# EAGLE board LCD_PCB (EAGLE 9.7.0)
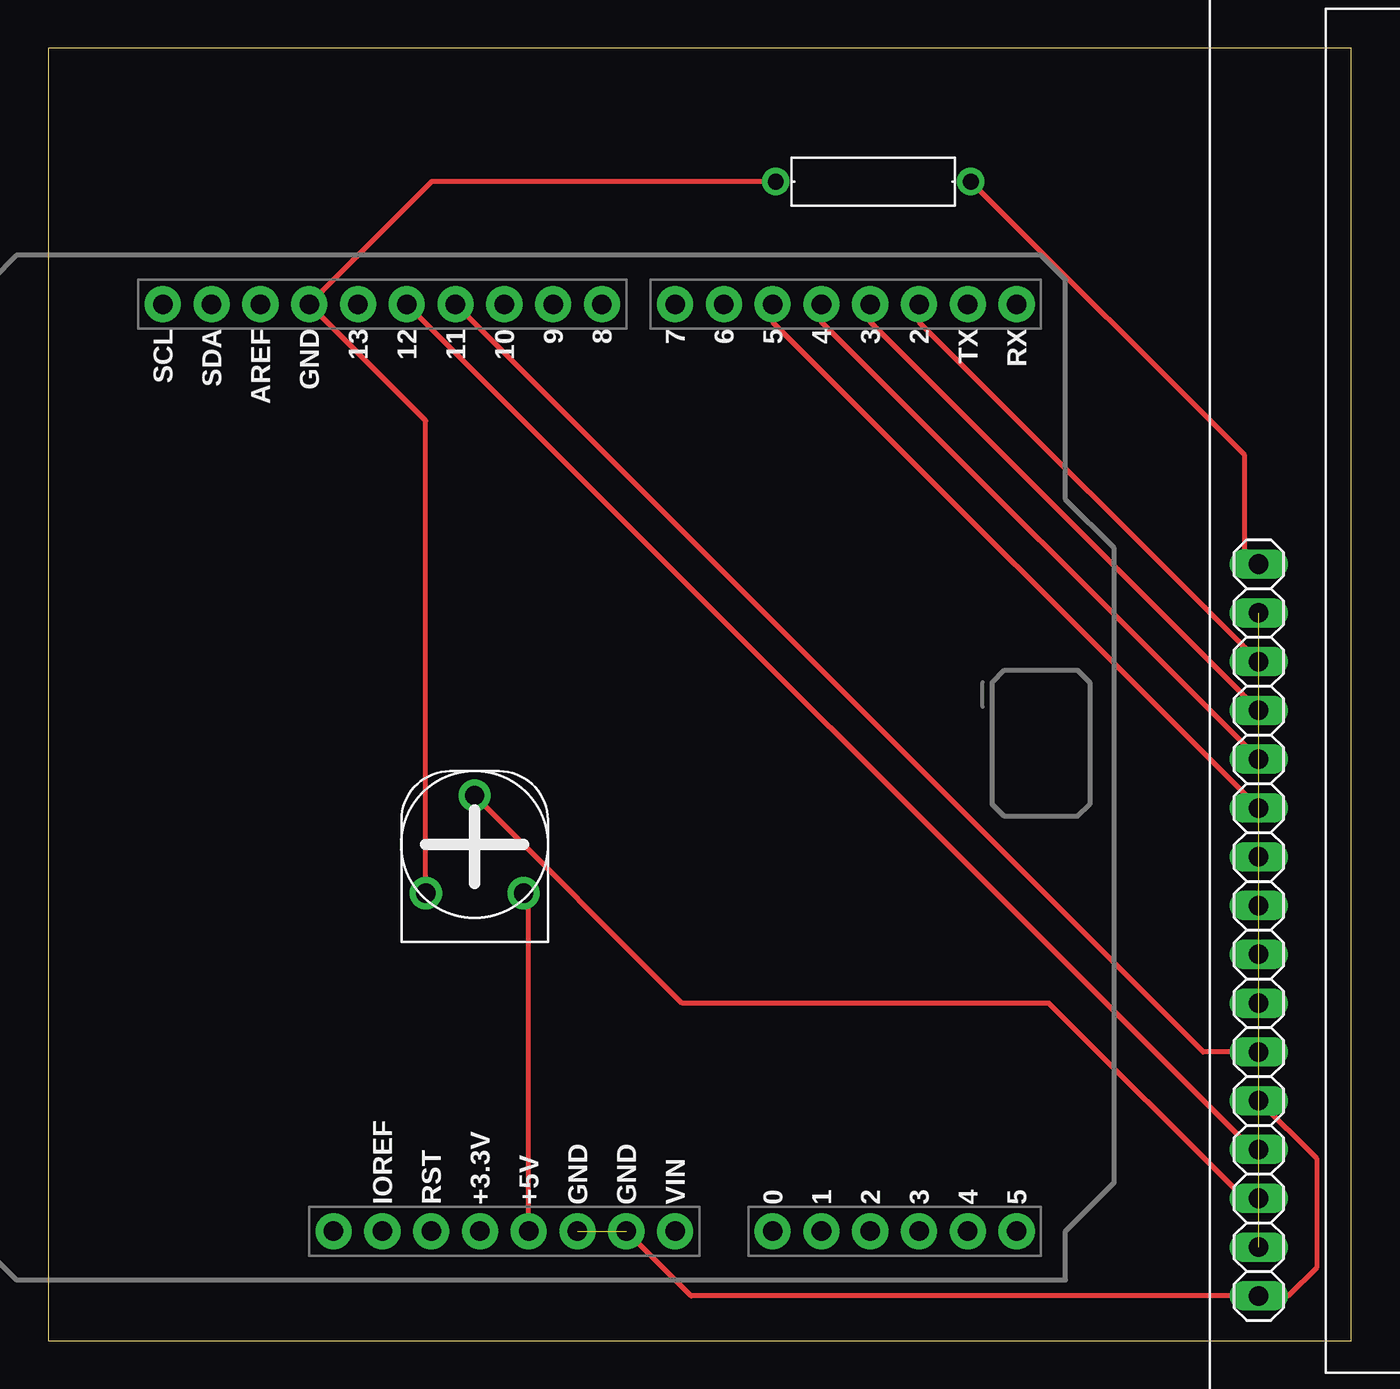
[diagram p0: board, top side]
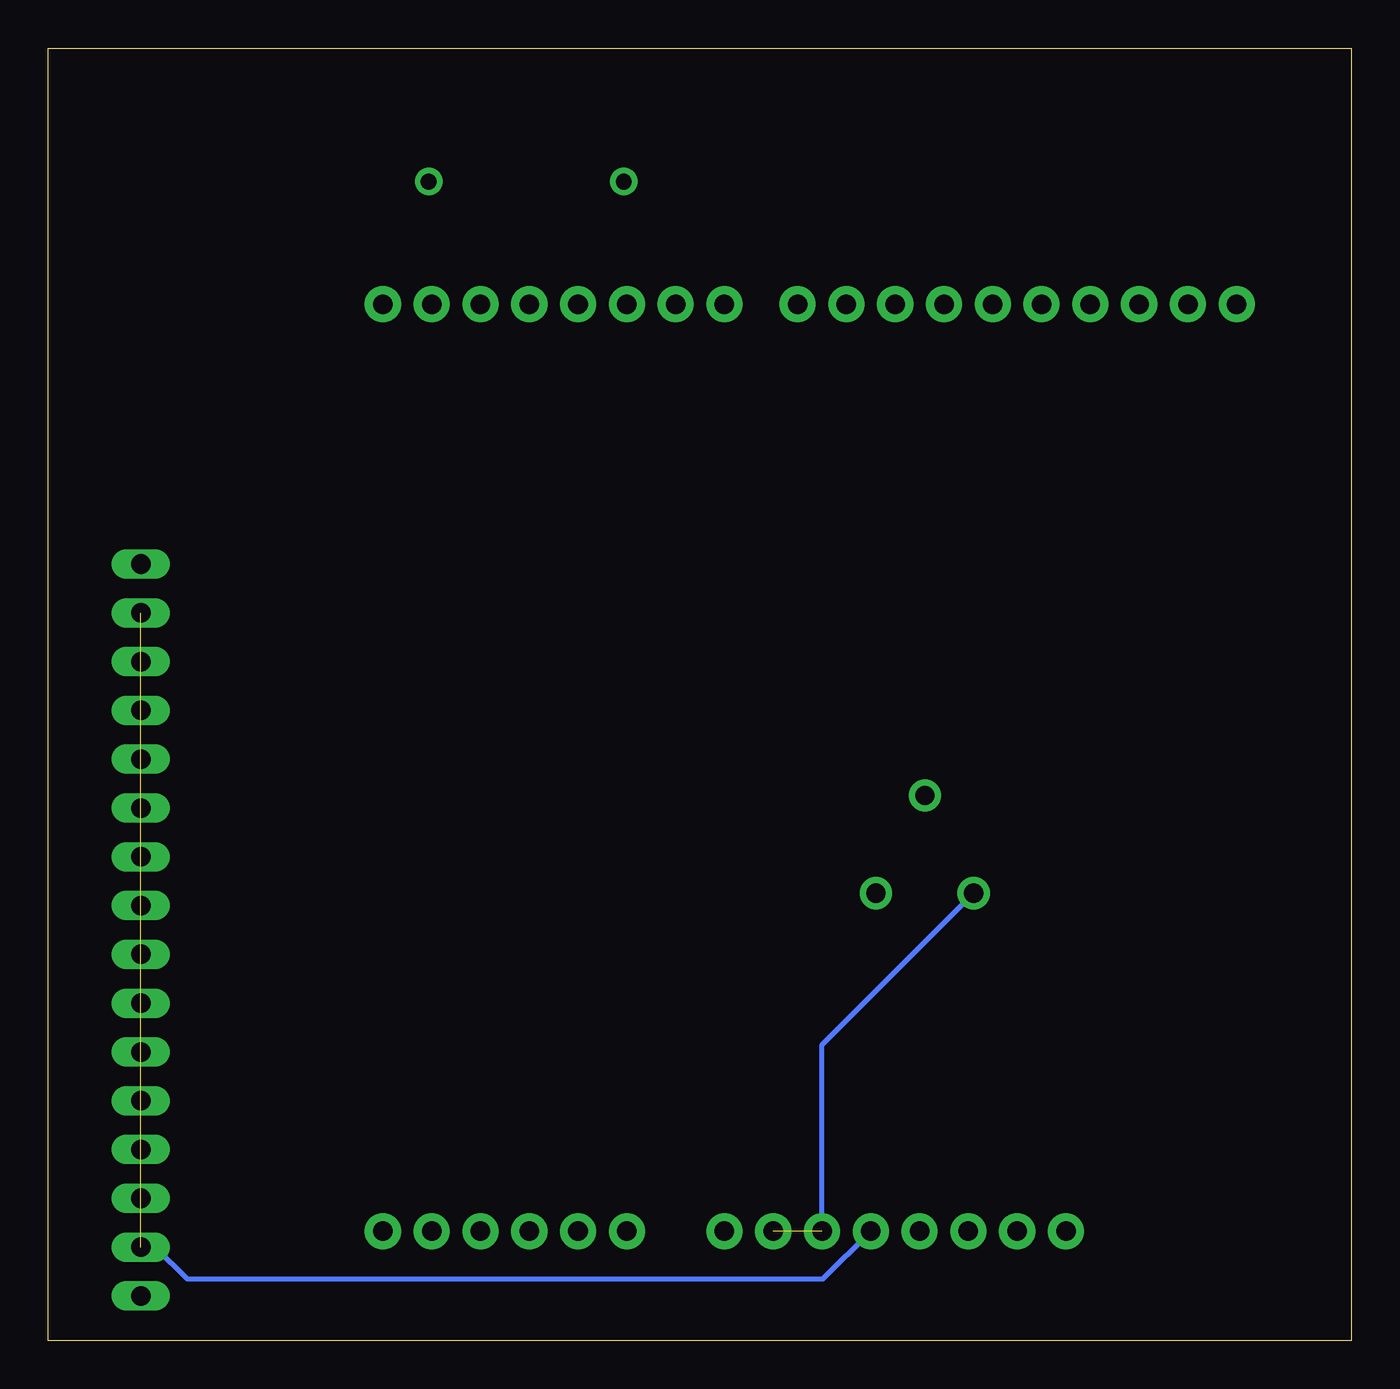
[diagram p1: board, bottom side, seen from below]

Size 67.86 x 67.3 mm. Coordinates in mm from the lower left corner, seen from the top.
Outline: 0,0 67.86,0 67.86,67.3 0,67.3 0,0
Copper layers (1*16): Top 0.035mm / dielectric 1.5mm / Bottom 0.035mm
Design rules "default": minimum track width 6mil, minimum drill 0.35mm, track to track 6mil, track to pad 6mil, pad to pad 6mil, via to via 6mil, smd to smd 6mil, copper to edge 40mil, drill to drill 6mil, minimum pad ring 10mil, minimum via ring 8mil, stop-mask expansion 4mil, vias tented up to drill 0mil, thermal gap 10mil

## Footprints (pad centres in the part's own frame; a part is rotated, then mirrored left to right if it is on the bottom)
RESAD1016W63L850D250B = drill 0.83 pad 1.43: 1 -5.08,0; 2 5.08,0
HA-06-SM065 = drill 1 pad 1.676: 1 -2.54,-2.54; 2 0,2.54; 3 2.54,-2.54
JHD-162A = drill 1.016 long: 1 -19.05,0; 2 -16.51,0; 3 -13.97,0; 4 -11.43,0; 5 -8.89,0; 6 -6.35,0; 7 -3.81,0; 8 -1.27,0; 9 1.27,0; 10 3.81,0; 11 6.35,0; 12 8.89,0; 13 11.43,0; 14 13.97,0; 15 16.51,0; 16 19.05,0
ARDUINO-UNO-R3-SHIELD = drill 1.016 pad 1.88: 3.3V 24.13,-2.54; 5V 24.13,0; A0 24.13,12.7; A1 24.13,15.24; A2 24.13,17.78; A3 24.13,20.32; A4 24.13,22.86; A5 24.13,25.4; AREF -24.13,-13.97; D2 -24.13,20.32; D3 -24.13,17.78; D4 -24.13,15.24; D5 -24.13,12.7; D6 -24.13,10.16; D7 -24.13,7.62; D8 -24.13,3.81; D9 -24.13,1.27; D10 -24.13,-1.27; D11 -24.13,-3.81; D12 -24.13,-6.35; D13 -24.13,-8.89; GND@0 24.13,2.54; GND@1 24.13,5.08; GND@2 -24.13,-11.43; IOREF 24.13,-7.62; NC 24.13,-10.16; RES 24.13,-5.08; RX -24.13,25.4; SCL -24.13,-19.05; SDA -24.13,-16.51; TX -24.13,22.86; VIN 24.13,7.62

## Placement (x,y rotation side)
R1  1k  [RESAD1016W63L850D250B]  42.96,60.35 0 top
RPOT1  250k  [HA-06-SM065]  22.21,25.84 0 top
U1  LCD-16X2JHD-162A  [JHD-162A]  63.03,21.39 90 top
U2  ARDUINO-UNO-R3-SHIELD  [ARDUINO-UNO-R3-SHIELD]  25.02,29.84 270 top

## Library data of the parts
R1 RPOT1 U1 U2 = Tinkercad

## Nets
U1_LED-: R1.2 U1.16
U1_VO: RPOT1.2 U1.3
U2_5V: RPOT1.3 U1.2 U1.15 U2.5V
U2_D2: U1.14 U2.D2
U2_D3: U1.13 U2.D3
U2_D4: U1.12 U2.D4
U2_D5: U1.11 U2.D5
U2_D11: U1.6 U2.D11
U2_D12: U1.4 U2.D12
U2_GND: R1.1 RPOT1.1 U1.1 U1.5 U2.GND@0 U2.GND@1 U2.GND@2

## Tracks (layer width: path | path; a pad name or v marks a point on that pad's centre or on a via)
U1_LED-
  Top 0.254: R1.2 62.27,46.12 62.27,40.44 U1.16
U1_VO
  Top 0.254: U1.3 62.27,7.42 52.11,17.58 33.02,17.58 RPOT1.2
U2_5V  (1 unrouted)
  Top 0.254: U2.5V 25.02,23.03 RPOT1.3
  Bottom 0.254: U1.2 62.27,4.88 60.61,3.22 27.51,3.22 U2.5V
U2_D2
  Top 0.254: U2.D2 45.34,53.04 U1.14
U2_D3
  Top 0.254: U2.D3 42.8,53.04 U1.13
U2_D4
  Top 0.254: U2.D4 40.27,53.04 U1.12
U2_D5
  Top 0.254: U2.D5 37.72,53.04 U1.11
U2_D11
  Top 0.254: U2.D11 60.14,15.04 62.27,15.04 U1.6
U2_D12
  Top 0.254: U2.D12 62.69,9.96 U1.4
U2_GND  (1 unrouted)
  Top 0.254: R1.1 19.98,60.35 U2.GND@2 19.67,47.89 RPOT1.1 | U2.GND@1 33.47,2.34 U1.1 64.57,2.34 66.04,3.81 66.04,9.49 U1.5
  Bottom 0.254: U2.GND@0 27.56,15.41 RPOT1.1